# Altium PCB AIO.PcbDoc
Units mil, origin at the board's own origin, x right, y up, seen from the top; angles counter-clockwise.
Board outline 2874.02 x 2007.87 mil, 2 copper layers (Top Layer, Bottom Layer); 3 components, 41 nets, 204 pads, 0 vias.
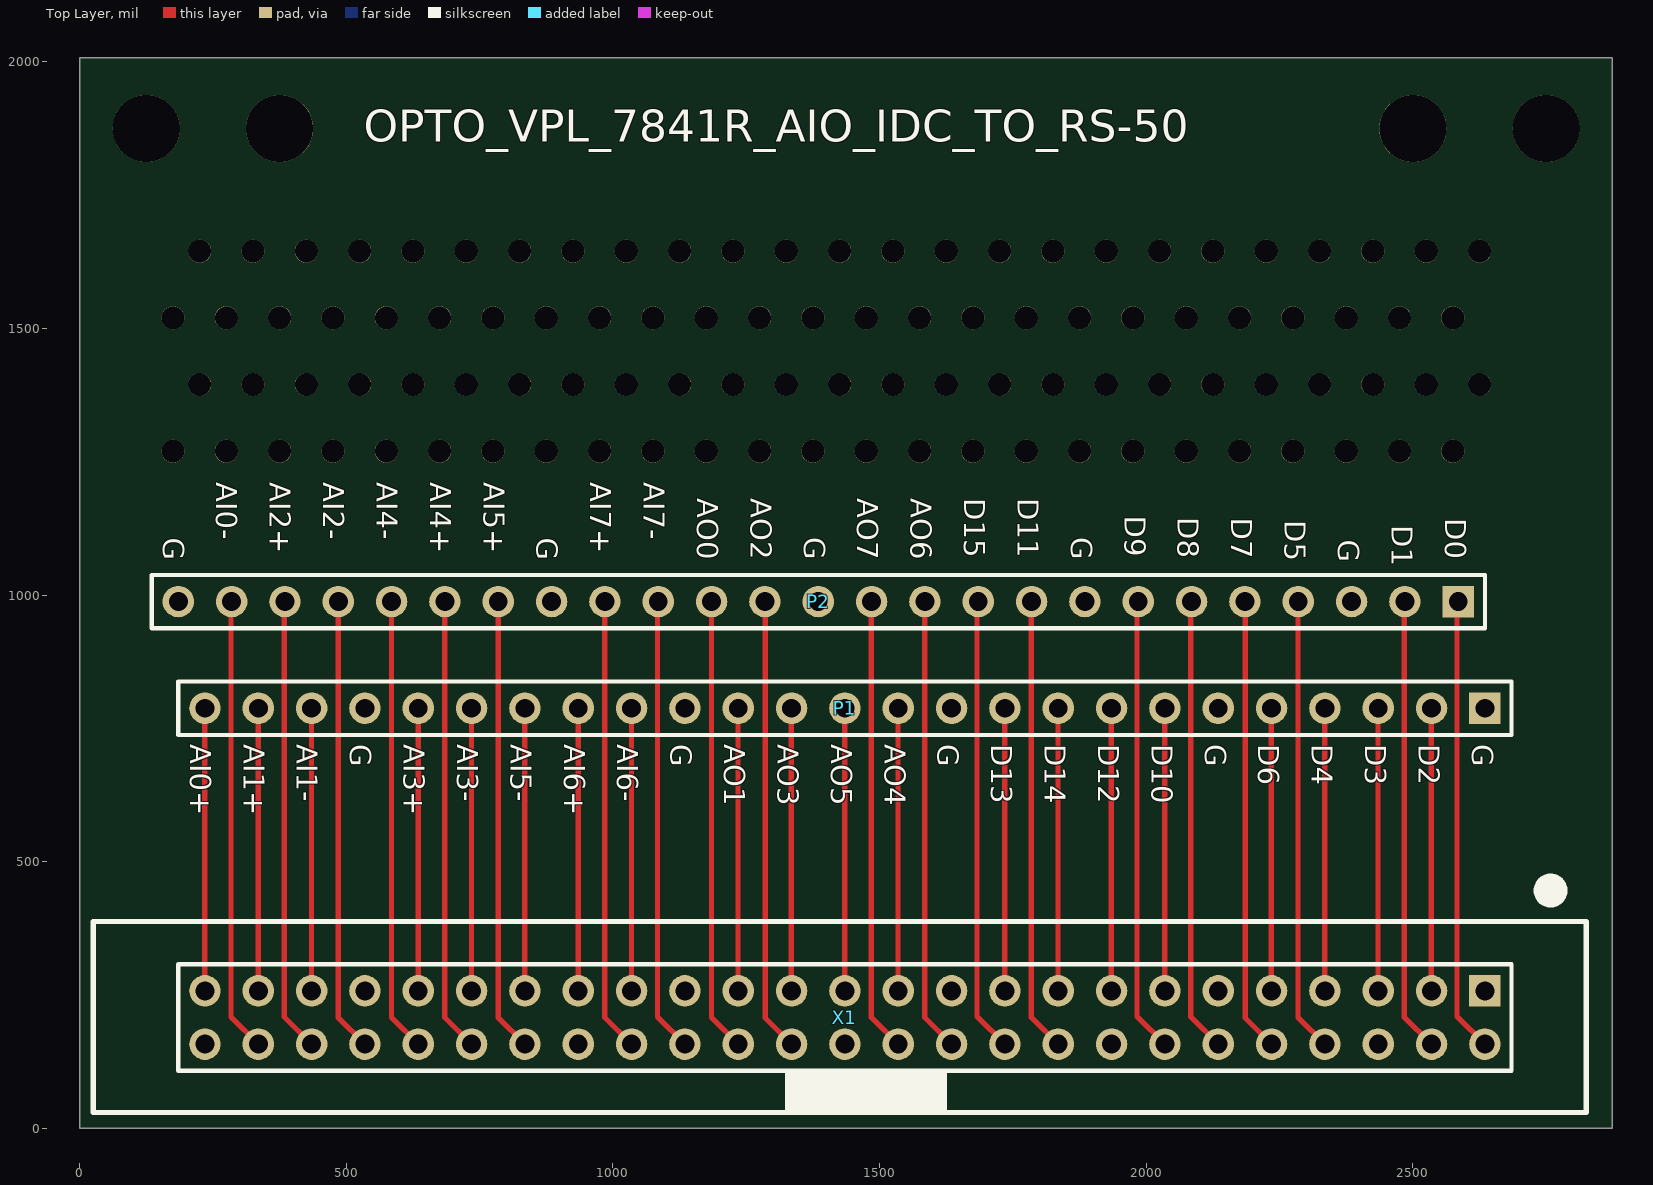
[diagram p0: Top Layer view]
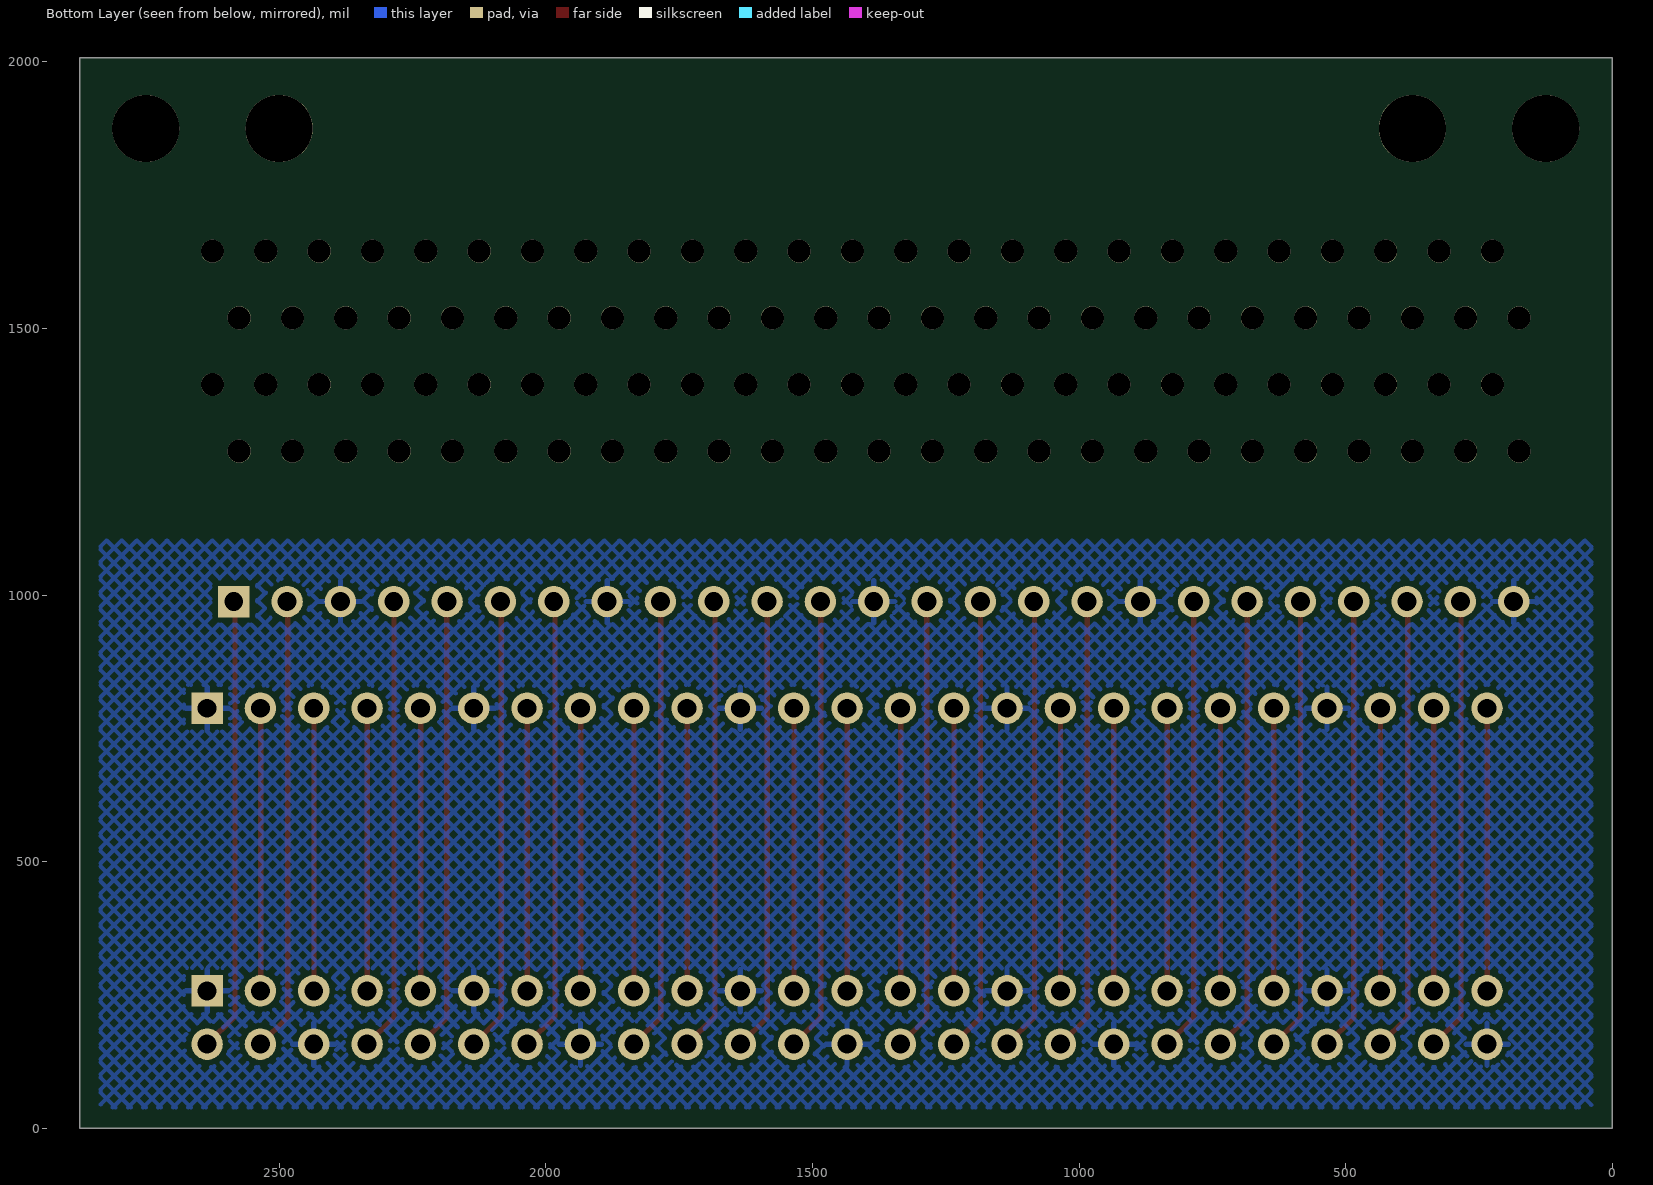
[diagram p1: Bottom Layer view, seen from below]

## Layer stack, top to bottom
Top Solder: solder mask 0.4, Solder Resist, Dk 3.5
Top Layer: signal copper 1.4
Dielectric 1: dielectric 12.6, FR-4, Dk 4.8
Bottom Layer: signal copper 1.4
Bottom Solder: solder mask 0.4, Solder Resist, Dk 3.5

## Board outline
0,0 2874.02,0 2874.02,2007.87 0,2007.87

## Design rules (kind name [scope] priority, off if disabled: settings)
Clearance [All] p1: gap=10 ignorepadtopadclearanceinfootprint=FALSE
PolygonConnect [All] p1: connectstyle=Relief reliefconductorwidth=10 reliefentries=4 polygonreliefangle="90 Angle" airgapwidth=10
RoutingVias [All] p1: holewidth=28 width=50 viastyle="Through Hole" minholewidth=28 minwidth=50 maxholewidth=28 maxwidth=50
SolderMaskExpansion [All] p1: expansion=4 istentingtop=FALSE
Width [All] p1: maxlimit=10 minlimit=10 preferedwidth=10
30 further rules are at their usual default settings.

## Components (designator, comment, footprint, x,y, rotation, side; value= is the part's Value field where it differs from the comment)
P1 "Header 25" HDR1X25 2635,788 r180 top
P2 "Header 25" HDR1X25 2585,988 r180 top
X1 "IDC_AIO" IDC_AIO 2635,258 r180 top

## Footprints (in the part's own frame and the unit in brackets; to place one, negate y for a bottom-side part, rotate by r counter-clockwise, add the part's x,y. Pads: shape width x height; smd on the part's side, far side on the other; paste and mask are expansions set on the pad)
HDR1X25 [mm] "Connector; Header; 25 Position"
  rect 1.5x1.5 hole 0.9: 1(0,0)
  round 1.5 hole 0.9: 2(2.54,0) 3(5.08,0) 4(7.62,0) 5(10.16,0) 6(12.7,0) 7(15.24,0) 8(17.78,0) 9(20.32,0) 10(22.86,0) 11(25.4,0) 12(27.94,0) 13(30.48,0) 14(33.02,0) 15(35.56,0) 16(38.1,0) 17(40.64,0) 18(43.18,0) 19(45.72,0) 20(48.26,0) 21(50.8,0) 22(53.34,0) 23(55.88,0) 24(58.42,0) 25(60.96,0)
  silkscreen extent -1.27,-1.27 62.23,1.27
IDC_AIO [mm]
  rect 1.5x1.5 hole 0.9: 1(0,0)
  round 1.5 hole 0.9: 2(0,2.54) 3(2.54,0) 4(2.54,2.54) 5(5.08,0) 6(5.08,2.54) 7(7.62,0) 8(7.62,2.54) 9(10.16,0) 10(10.16,2.54) 11(12.7,0) 12(12.7,2.54) 13(15.24,0) 14(15.24,2.54) 15(17.78,0) 16(17.78,2.54) 17(20.32,0) 18(20.32,2.54) 19(22.86,0) 20(22.86,2.54) 21(25.4,0) 22(25.4,2.54) 23(27.94,0) 24(27.94,2.54) 25(30.48,0) 26(30.48,2.54) 27(33.02,0) 28(33.02,2.54) 29(35.56,0) 30(35.56,2.54) 31(38.1,0) 32(38.1,2.54) 33(40.64,0) 34(40.64,2.54) 35(43.18,0) 36(43.18,2.54) 37(45.72,0) 38(45.72,2.54) 39(48.26,0) 40(48.26,2.54) 41(50.8,0) 42(50.8,2.54) 43(53.34,0) 44(53.34,2.54) 45(55.88,0) 46(55.88,2.54) 47(58.42,0) 48(58.42,2.54) 49(60.96,0) 50(60.96,2.54)
  silkscreen extent -4.83,-5.16 66.27,5.85

## Part data
P1 P2: "Header, 25-Pin", LatestRevisionDate=17-Jul-2002, LatestRevisionNote="Re-released for DXP Platform.", Publisher="Altium Limited"

## Free pads (board coordinates)
  round 125.98 hole 125.98 unplated: 0(125,1875) 0(375,1875) 0(2500,1875) 0(2750,1875)
  round 43.31 hole 43.31 unplated: 0(175,1270) 0(175,1520) 0(225,1395) 0(225,1645) 0(275,1270) 0(275,1520) 0(325,1395) 0(325,1645) 0(375,1270) 0(375,1520) 0(425,1395) 0(425,1645) 0(475,1270) 0(475,1520) 0(525,1395) 0(525,1645) 0(575,1270) 0(575,1520) 0(625,1395) 0(625,1645) 0(675,1270) 0(675,1520) 0(725,1395) 0(725,1645) 0(775,1270) 0(775,1520) 0(825,1395) 0(825,1645) 0(875,1270) 0(875,1520) 0(925,1395) 0(925,1645) 0(975,1270) 0(975,1520) 0(1025,1395) 0(1025,1645) 0(1075,1270) 0(1075,1520) 0(1125,1395) 0(1125,1645) 0(1175,1270) 0(1175,1520) 0(1225,1395) 0(1225,1645) 0(1275,1270) 0(1275,1520) 0(1325,1395) 0(1325,1645) 0(1375,1270) 0(1375,1520) 0(1425,1395) 0(1425,1645) 0(1475,1270) 0(1475,1520) 0(1525,1395) 0(1525,1645) 0(1575,1270) 0(1575,1520) 0(1625,1395) 0(1625,1645) 0(1675,1270) 0(1675,1520) 0(1725,1395) 0(1725,1645) 0(1775,1270) 0(1775,1520) 0(1825,1395) 0(1825,1645) 0(1875,1270) 0(1875,1520) 0(1925,1395) 0(1925,1645) 0(1975,1270) 0(1975,1520) 0(2025,1395) 0(2025,1645) 0(2075,1270) 0(2075,1520) 0(2125,1395) 0(2125,1645) 0(2175,1270) 0(2175,1520) 0(2225,1395) 0(2225,1645) 0(2275,1270) 0(2275,1520) 0(2325,1395) 0(2325,1645) 0(2375,1270) 0(2375,1520) 0(2425,1395) 0(2425,1645) 0(2475,1270) 0(2475,1520) 0(2525,1395) 0(2525,1645) 0(2575,1270) 0(2575,1520) 0(2625,1395) 0(2625,1645)

## Nets (pads, with @x,y where several pads share a name; then routed paths per layer and width w, separated by ;. In a path a pad name is that pad's centre, name@x,y a point inside that pad or via, vN(x,y) a via of type N, cw(c..) or ccw(c..) an arc to the next point about the centre after c; other vN are vias at no path point)
AI0+: P1.25 X1.49 | length 500.3
  Top Layer w10: X1.49@234.65,258 234.65,758.27
AI0-: P2.24 X1.48 | length 821.6
  Top Layer w10: 283.65,958.27 283.65,307.27 283.65,209.27 X1.48@334.96,157.96
AI1+: P1.24 X1.47 | length 500.3
  Top Layer w10: X1.47@334.65,258 334.65,758.27
AI1-: P1.23 X1.45 | length 500.3
  Top Layer w10: X1.45@434.65,258 434.65,758.27
AI2+: P2.23 X1.46 | length 821.6
  Top Layer w10: 383.65,958.27 383.65,209.27 X1.46@434.96,157.96
AI2-: P2.22 X1.44 | length 821.2
  Top Layer w10: 484.65,958.27 484.65,313.27 484.65,208.27 X1.44@534.96,157.96
AI3+: P1.21 X1.41 | length 500.3
  Top Layer w10: X1.41@634.65,258 634.65,758.27
AI3-: P1.20 X1.39 | length 500.3
  Top Layer w10: X1.39@734.65,258 734.65,758.27
AI4+: P2.20 X1.40 | length 821.2
  Top Layer w10: 684.65,958.27 684.65,310.27 684.65,208.27 X1.40@734.96,157.96
AI4-: P2.21 X1.42 | length 821.2
  Top Layer w10: 584.65,958.27 584.65,300.27 584.65,208.27 X1.42@634.96,157.96
AI5+: P2.19 X1.38 | length 821.2
  Top Layer w10: 784.65,958.27 784.65,350.27 784.65,208.27 X1.38@834.96,157.96
AI5-: P1.19 X1.37 | length 500.3
  Top Layer w10: X1.37@834.65,258 834.65,758.27
AI6+: P1.18 X1.35 | length 500.3
  Top Layer w10: X1.35@934.65,258 934.65,758.27
AI6-: P1.17 X1.33 | length 500.3
  Top Layer w10: X1.33@1034.65,258 1034.65,758.27
AI7+: P2.17 X1.34 | length 821.2
  Top Layer w10: 984.65,958.27 984.65,351.27 984.65,208.27 X1.34@1034.96,157.96
AI7-: P2.16 X1.32 | length 821.6
  Top Layer w10: 1083.65,958.27 1083.65,368.27 1083.65,209.27 X1.32@1134.96,157.96
AO0: P2.15 X1.30 | length 821.2
  Top Layer w10: 1184.65,958.27 1184.65,328.27 1184.65,208.27 X1.30@1234.96,157.96
AO1: P1.15 X1.29 | length 500.3
  Top Layer w10: X1.29@1234.65,258 1234.65,758.27
AO2: P2.14 X1.28 | length 820.7
  Top Layer w10: 1285.65,958.27 1285.65,372.27 1285.65,207.27 X1.28@1334.96,157.96
AO3: P1.14 X1.27 | length 500.3
  Top Layer w10: X1.27@1334.65,258 1334.65,758.27
AO4: P1.12 X1.23 | length 500.3
  Top Layer w10: X1.23@1534.65,258 1534.65,758.27
AO5: P1.13 X1.25 | length 500.3
  Top Layer w10: X1.25@1434.65,258 1434.65,758.27
AO6: P2.11 X1.22 | length 821.2
  Top Layer w10: 1584.65,958.27 1584.65,296.27 1584.65,208.27 X1.22@1634.96,157.96
AO7: P2.12 X1.24 | length 821.2
  Top Layer w10: 1484.65,958.27 1484.65,339.27 1484.65,208.27 X1.24@1534.96,157.96
DGND: P1.1 P1.6 P1.11 P1.16 P1.22 P2.3 P2.8 P2.13 P2.18 P2.25 X1.1 X1.6 X1.11 X1.16 X1.21 X1.26 X1.31 X1.36 X1.43 X1.50
DIO0: P2.1 X1.2 | length 822
  Top Layer w10: 2582.65,958.27 2582.65,296.27 2582.65,210.27 X1.2@2634.96,157.96
DIO1: P2.2 X1.4 | length 821.6
  Top Layer w10: 2483.65,958.27 2483.65,293.27 2483.65,209.27 X1.4@2534.96,157.96
DIO2: P1.2 X1.3 | length 500.3
  Top Layer w10: X1.3@2534.65,258 2534.65,758.27
DIO3: P1.3 X1.5 | length 500.3
  Top Layer w10: X1.5@2434.65,258 2434.65,758.27
DIO4: P1.4 X1.7 | length 500.3
  Top Layer w10: X1.7@2334.65,258 2334.65,758.27
DIO5: P2.4 X1.8 | length 821.2
  Top Layer w10: 2284.65,958.27 2284.65,292.27 2284.65,208.27 X1.8@2334.96,157.96
DIO6: P1.5 X1.9 | length 500.3
  Top Layer w10: X1.9@2234.65,258 2234.65,758.27
DIO7: P2.5 X1.10 | length 820.7
  Top Layer w10: 2185.65,958.27 2185.65,352.27 2185.65,207.27 X1.10@2234.96,157.96
DIO8: P2.6 X1.12 | length 821.6
  Top Layer w10: 2083.65,958.27 2083.65,310.27 2083.65,209.27 X1.12@2134.96,157.96
DIO9: P2.7 X1.14 | length 822
  Top Layer w10: 1982.65,958.27 1982.65,298.27 1982.65,210.27 X1.14@2034.96,157.96
DIO10: P1.7 X1.13 | length 500.3
  Top Layer w10: X1.13@2034.65,258 2034.65,758.27
DIO11: P2.9 X1.18 | length 821.2
  Top Layer w10: 1784.65,958.27 1784.65,332.27 1784.65,208.27 X1.18@1834.96,157.96
DIO12: P1.8 X1.15 | length 500.3
  Top Layer w10: X1.15@1934.65,258 1934.65,758.27
DIO13: P1.10 X1.19 | length 500.3
  Top Layer w10: X1.19@1734.65,258 1734.65,758.27
DIO14: P1.9 X1.17 | length 500.3
  Top Layer w10: X1.17@1834.65,258 1834.65,758.27
DIO15: P2.10 X1.20 | length 822
  Top Layer w10: 1682.65,958.27 1682.65,304.27 1682.65,210.27 X1.20@1734.96,157.96

## Polygon pours and split planes (outlines as drawn)
DGND on Bottom Layer "DGND_L02_P000" (hatched 45Degree grid 20 track 8, remove dead copper, pour order 0): 39.37,39.37 39.37,1102.36 2834.65,1102.36 2834.65,39.37

## Silkscreen, mask and mechanical layers (free items; w line width, h text height)
Top Overlay:
  text "OPTO_VPL_7841R_AIO_IDC_TO_RS-50" at 532.3,1850.01 h60
Mechanical 1:
  the board outline again, w10

## Text inside footprints (layer, text, board x,y; h text height)
X1: Top Overlay "AI0+" at 207.07,720.62 h39.37 r270; Top Overlay "AI6+" at 908.24,720.62 h39.37 r270; Top Overlay "AI1+" at 307.24,720.62 h39.37 r270; Top Overlay "AI0-" at 256.5,1211.32 h39.37 r270; Top Overlay "AI1-" at 407.41,720.62 h39.37 r270; Top Overlay "AI2+" at 356.67,1211.32 h39.37 r270; Top Overlay "AI2-" at 456.33,1211.29 h39.37 r270; Top Overlay "AI3+" at 607.74,720.62 h39.37 r270; Top Overlay "AI4-" at 557,1211.32 h39.37 r270; Top Overlay "AI3-" at 707.91,720.62 h39.37 r270; Top Overlay "AI4+" at 657.17,1211.32 h39.37 r270; Top Overlay "AI5-" at 808.07,720.62 h39.37 r270; Top Overlay "AI5+" at 757.33,1211.32 h39.37 r270; Top Overlay "AI6-" at 1008.41,720.62 h39.37 r270; Top Overlay "AI7+" at 957.67,1211.32 h39.37 r270; Top Overlay "AI7-" at 1057.83,1211.32 h39.37 r270; Top Overlay "AO1" at 1208.74,720.62 h39.37 r270; Top Overlay "AO0" at 1158,1181.72 h39.37 r270; Top Overlay "AO3" at 1308.91,720.62 h39.37 r270; Top Overlay "AO2" at 1258.17,1181.72 h39.37 r270; Top Overlay "AO5" at 1409.07,720.62 h39.37 r270; Top Overlay "G" at 156.33,1107.76 h39.37 r270; Top Overlay "G" at 507.57,720.62 h39.37 r270; Top Overlay "G" at 857.5,1107.76 h39.37 r270; Top Overlay "G" at 1108.57,720.62 h39.37 r270; Top Overlay "G" at 1358.33,1108.76 h39.37 r270; Top Overlay "AO4" at 1509.24,720.62 h39.37 r270; Top Overlay "AO7" at 1458.5,1181.72 h39.37 r270; Top Overlay "G" at 1609.41,720.62 h39.37 r270; Top Overlay "AO6" at 1558.66,1181.72 h39.37 r270; Top Overlay "D13" at 1709.57,720.62 h39.37 r270; Top Overlay "D15" at 1658.83,1181.72 h39.37 r270; Top Overlay "D14" at 1809.74,720.62 h39.37 r270; Top Overlay "D11" at 1759,1181.72 h39.37 r270; Top Overlay "D12" at 1909.9,720.62 h39.37 r270; Top Overlay "G" at 1859.16,1108.79 h39.37 r270; Top Overlay "G" at 2360,1103.79 h39.37 r270; Top Overlay "D10" at 2010.07,720.62 h39.37 r270; Top Overlay "D9" at 1959.33,1148.76 h39.37 r270; Top Overlay "G" at 2110.24,720.62 h39.37 r270; Top Overlay "D8" at 2059.5,1145.76 h39.37 r270; Top Overlay "D6" at 2210.4,720.62 h39.37 r270; Top Overlay "D7" at 2159.66,1144.76 h39.37 r270; Top Overlay "D4" at 2310.57,720.62 h39.37 r270; Top Overlay "D5" at 2259.83,1140.76 h39.37 r270; Top Overlay "D3" at 2410.74,720.62 h39.37 r270; Top Overlay "D2" at 2510.9,720.62 h39.37 r270; Top Overlay "D1" at 2460.16,1130.76 h39.37 r270; Top Overlay "D0" at 2560.33,1143.76 h39.37 r270; Top Overlay "G" at 2611.07,720.62 h39.37 r270